# Altium PCB DWM1000_Basic_Board.PcbDoc
Units mil, origin at the board's own origin, x right, y up, seen from the top; angles counter-clockwise.
Board outline 1023.62 x 1023.62 mil, 2 copper layers (Top Layer, Bottom Layer); 20 components, 27 nets, 71 pads, 12 vias.
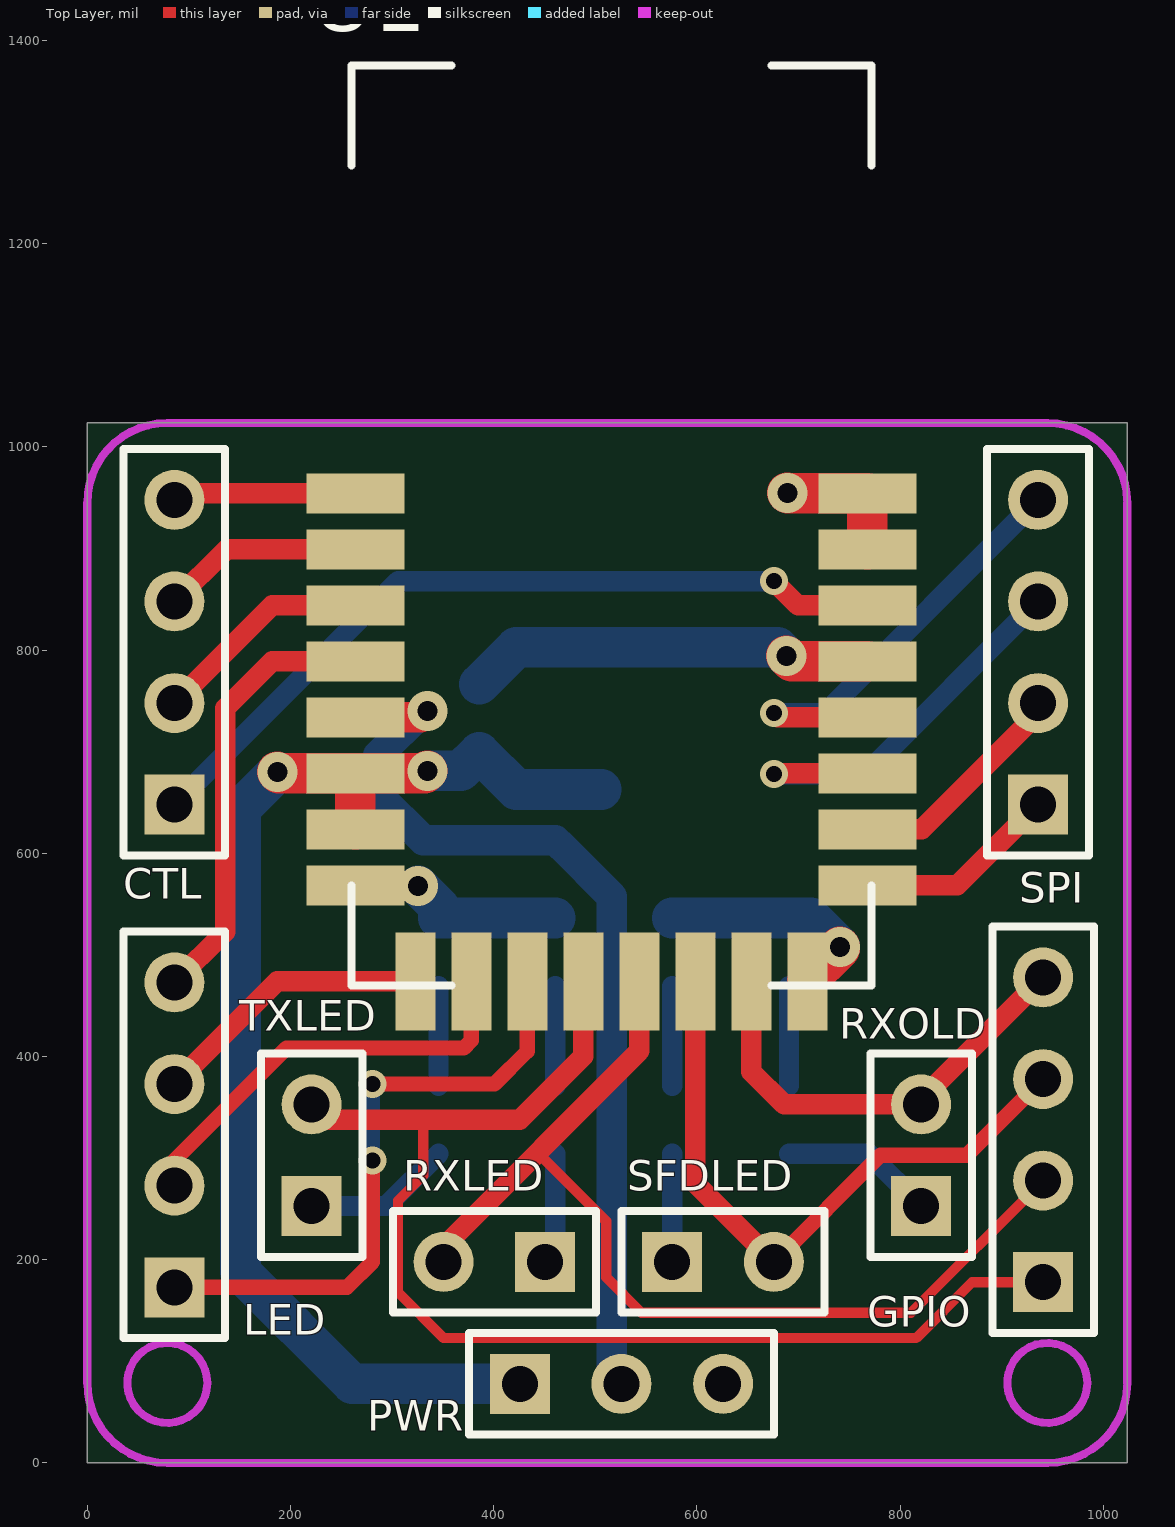
[diagram p0: Top Layer view]
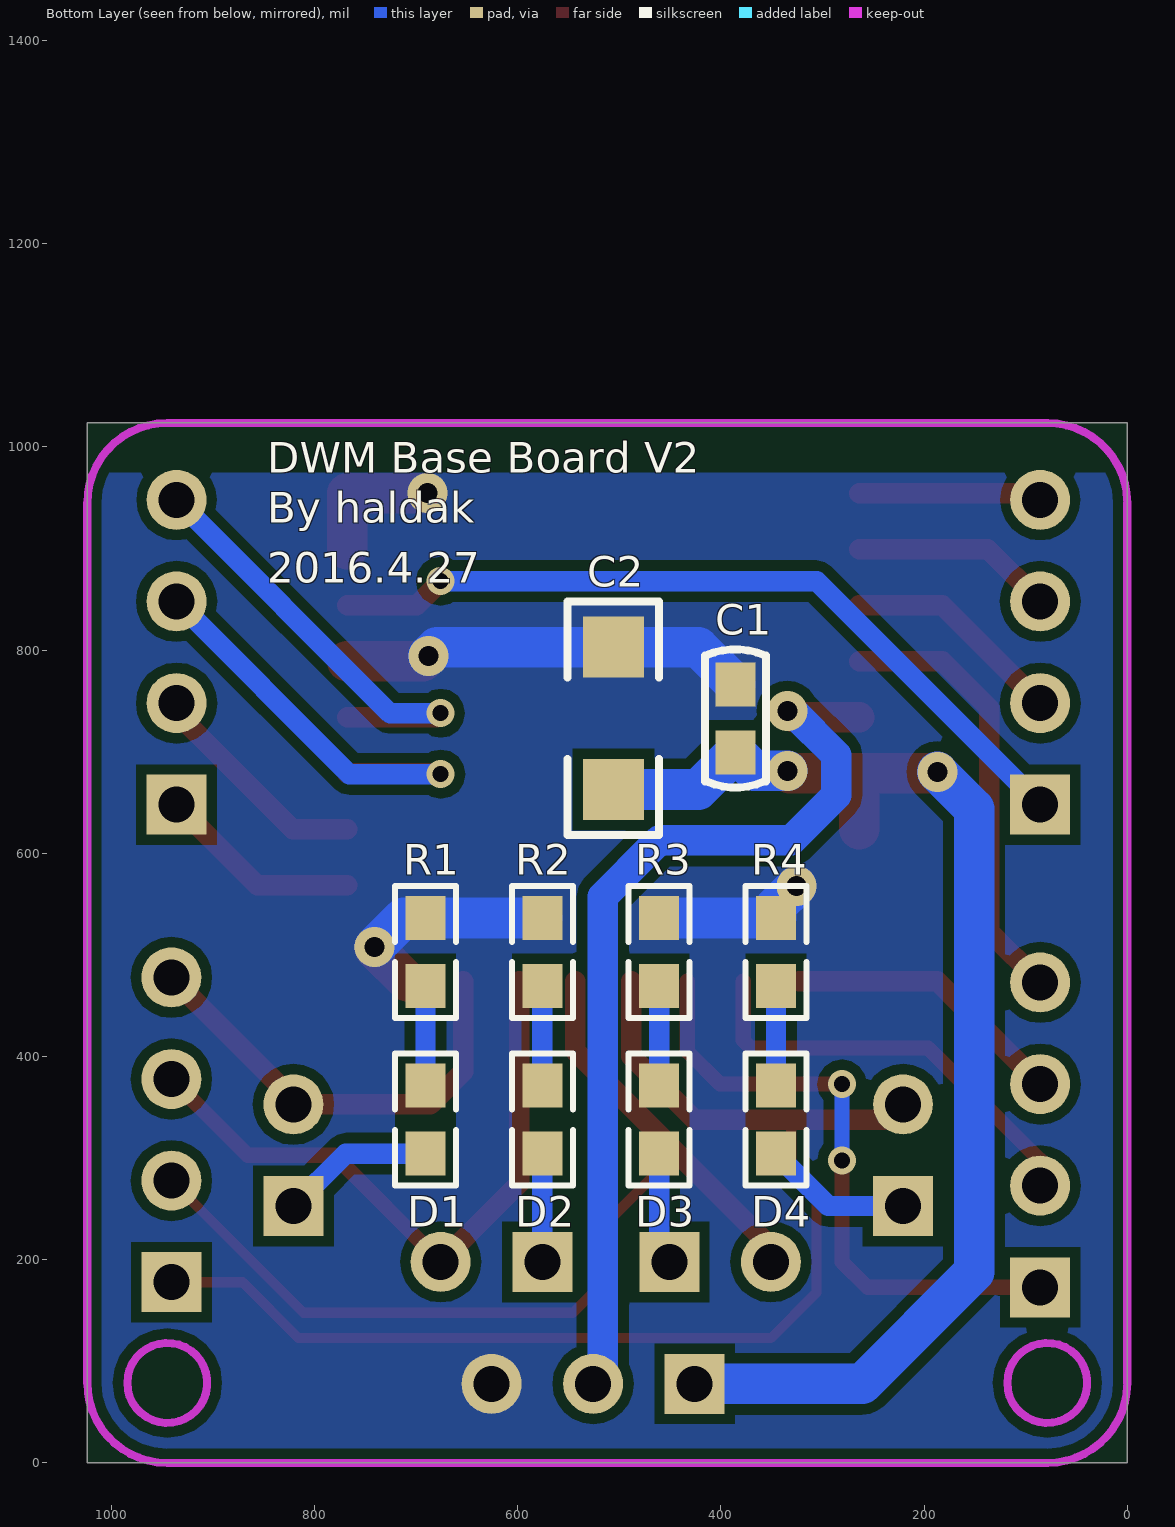
[diagram p1: Bottom Layer view, seen from below]
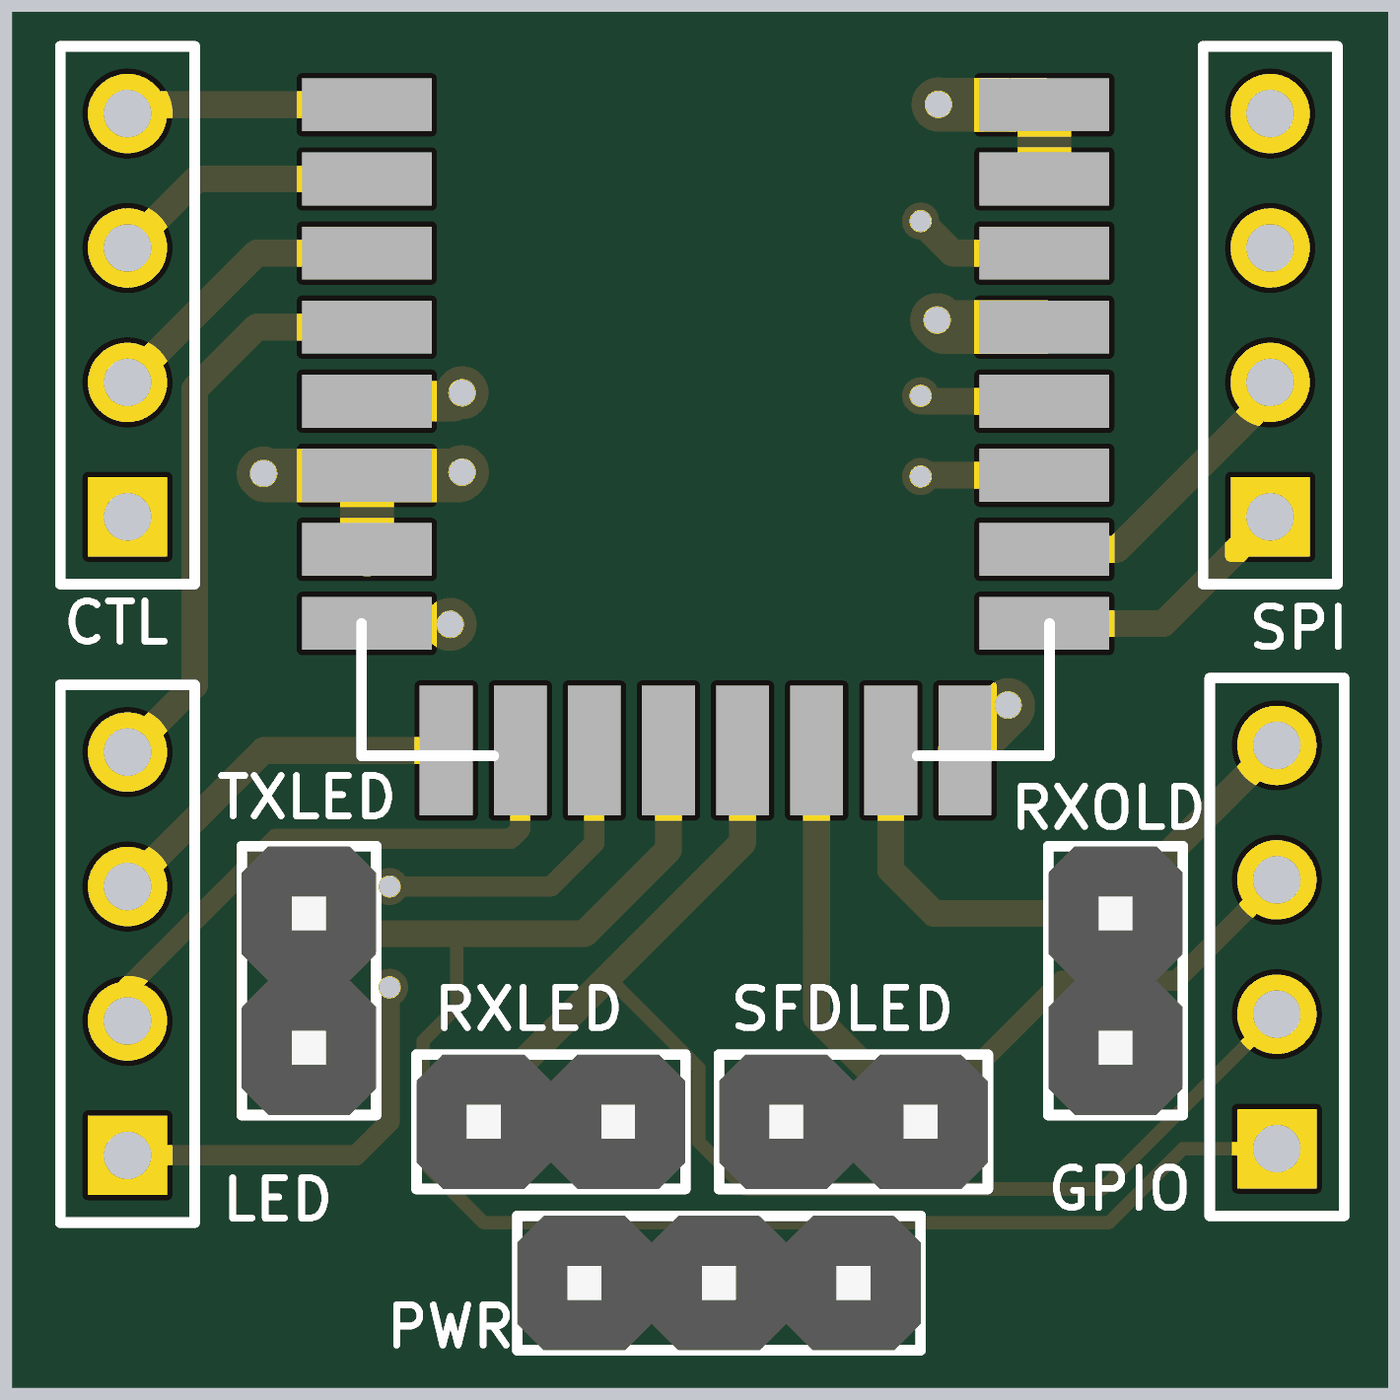
[diagram p2: 3D render of the assembled board from above, using the file's embedded part models]
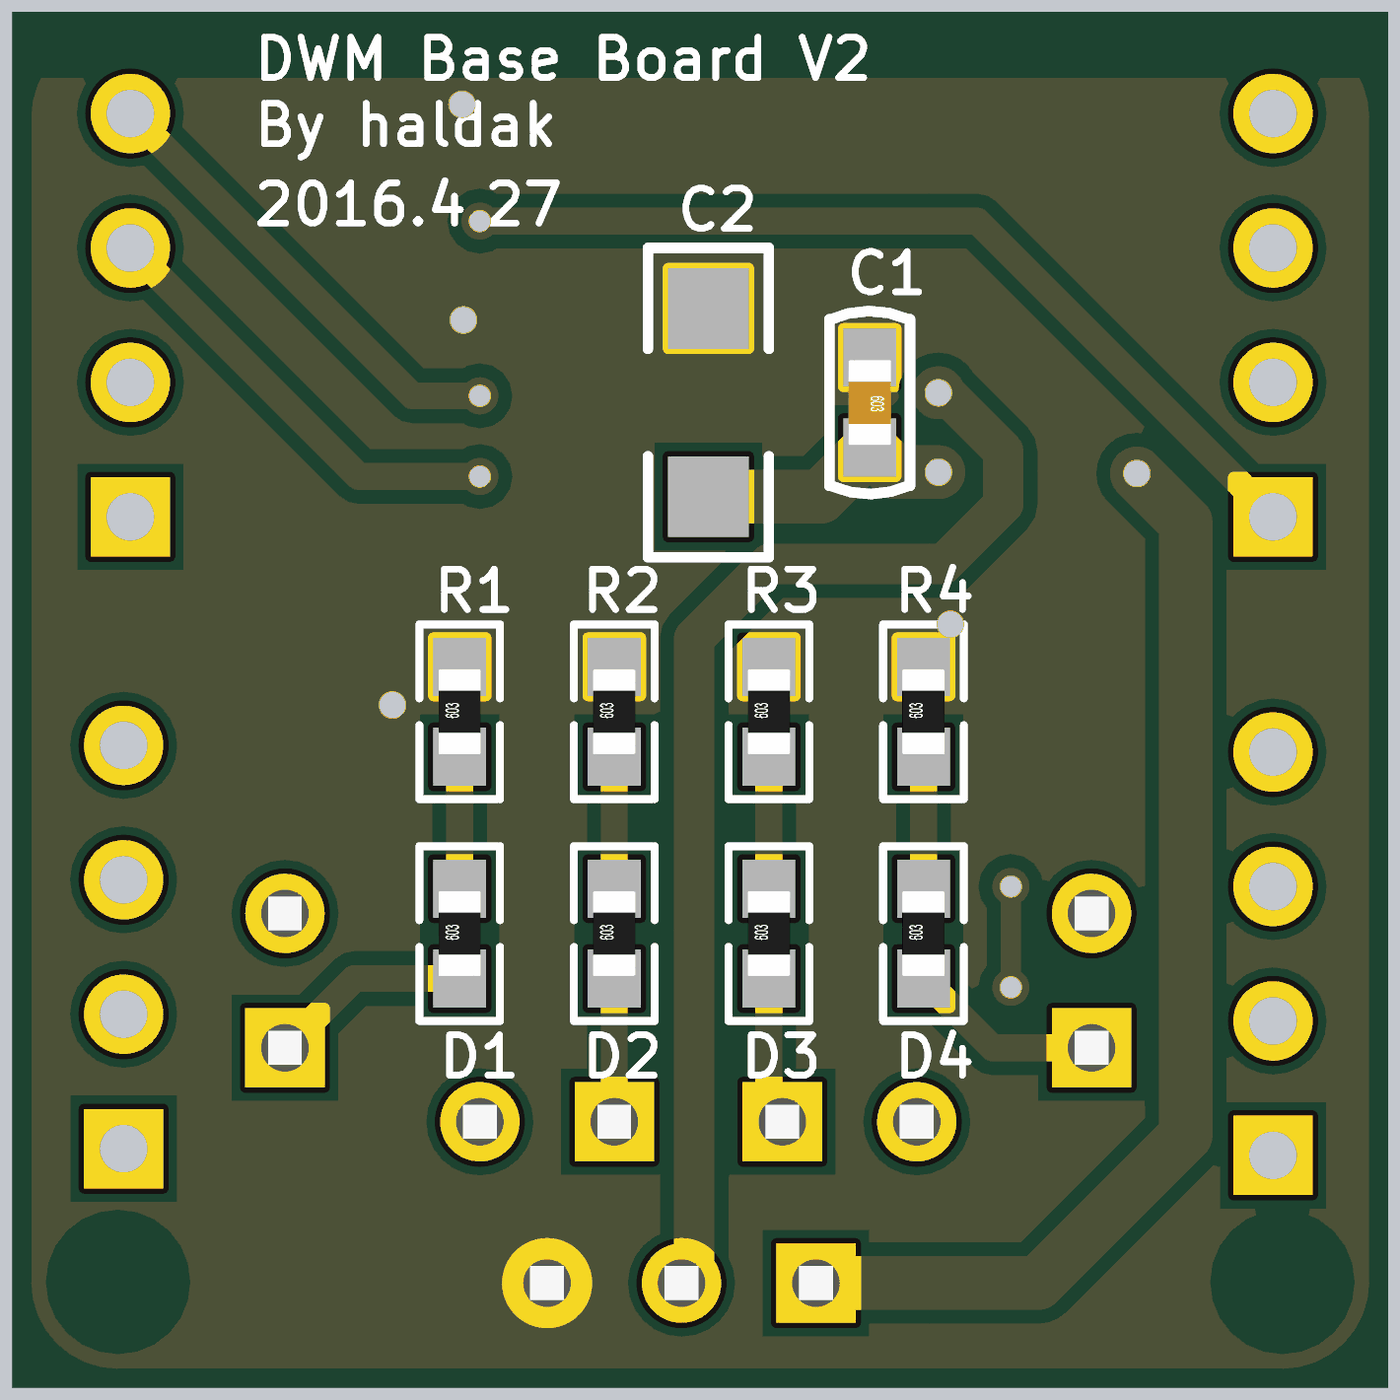
[diagram p3: 3D render of the assembled board from below, using the file's embedded part models]

## Layer stack, top to bottom
Top Solder: solder mask 0.4, Solder Resist, Dk 3.5
Top Layer: signal copper 1.4
Dielectric 1: dielectric 12.6, FR-4, Dk 4.8
Bottom Layer: signal copper 1.4
Bottom Solder: solder mask 0.4, Solder Resist, Dk 3.5

## Board outline
0,0 1023.62,0 1023.62,1023.62 0,1023.62

## Design rules (kind name [scope] priority, off if disabled: settings)
Clearance [All] p1: gap=10
PolygonConnect [All] p1: connectstyle=Direct reliefconductorwidth=10 reliefentries=4 polygonreliefangle="90 Angle" airgapwidth=10
RoutingVias [All] p1: holewidth=28 width=50 viastyle="Through Hole" minholewidth=28 minwidth=50 maxholewidth=28 maxwidth=50
SolderMaskExpansion [All] p1: expansion=4
Width [All] p1: maxlimit=50 minlimit=10 preferedwidth=10 minimp=50.000000 maximp=50.000000 favimp=50.000000
30 further rules are at their usual default settings.

## Components (designator, comment, footprint, x,y, rotation, side; value= is the part's Value field where it differs from the comment)
C1 "Cap-S" C-0603 385.75,732.88 r270 bottom
C2 "Cap-Pol" 1206 505.75,732.88 r90 bottom
CTL "Header 4" HDR4X1-2.54 85.75,647.88 r90 top
D1 "LED0" 0603-1 690.75,337.88 r90 bottom
D2 "LED0" 0603-1 575.75,337.88 r90 bottom
D3 "LED0" 0603-1 460.75,337.88 r90 bottom
D4 "LED0" 0603-1 345.75,337.88 r90 bottom
GPIO "Header 4" HDR4X1-2.54 940.75,177.88 r90 top
LED "Header 4" HDR4X1-2.54 85.75,172.88 r90 top
PWR "Header 3" HDR3X1-2.54 425.75,77.88 r0 top
R1 "Res1" 0603-1 690.75,502.88 r90 bottom
R2 "Res1" 0603-1 575.75,502.88 r90 bottom
R3 "Res1" 0603-1 460.75,502.88 r90 bottom
R4 "Res1" 0603-1 345.75,502.88 r90 bottom
RXLED "Header 2" HDR2X1-2.54 450.75,197.88 r180 top
RXOLD "Header 2" HDR2X1-2.54 820.75,252.88 r90 top (schematic designator RXOLED)
SFDLED "Header 2" HDR2X1-2.54 575.75,197.88 r0 top
SPI "Header 4" HDR4X1-2.54 935.75,647.88 r90 top
TXLED "Header 2" HDR2X1-2.54 220.75,252.88 r90 top
U1 "DWM1000" DWM1000 515.75,922.88 r0 top

## Footprints (in the part's own frame and the unit in brackets; to place one, negate y for a bottom-side part, rotate by r counter-clockwise, add the part's x,y. Pads: shape width x height; smd on the part's side, far side on the other; paste and mask are expansions set on the pad)
0603-1 [mm] "0603带丝印"
  rect 1.1x1 smd: 1(-0.85,0) 2(0.85,0)
  silkscreen extent -1.65,-0.76 1.65,0.76, body extent -0.8,-0.4 0.8,0.4, height 0.3
1206 [mil] "贴片元件"
  rect 60x60 smd: 1(-70,0) 2(70,0)
  silkscreen extent -115,-45 115,45, body extent -75,-35 75,35, height 39
C-0603 [mm] "贴片电容"
  rect 1.1x1 smd: 1(-0.85,0) 2(0.85,0)
  silkscreen extent -1.73,-0.76 1.73,0.76, body extent -0.8,-0.4 0.8,0.4, height 0.3
DWM1000 [mm] "Decawave Inc."
  rect 2.45x1 smd paste+0 mask+0.1: 1(-6.4,0.8) 2(-6.4,-0.6) 3(-6.4,-2) 4(-6.4,-3.4) 5(-6.4,-4.8) 6(-6.4,-6.2) 7(-6.4,-7.6) 8(-6.4,-9) 17(6.4,-9) 18(6.4,-7.6) 19(6.4,-6.2) 20(6.4,-4.8) 21(6.4,-3.4) 22(6.4,-2) 23(6.4,-0.6) 24(6.4,0.8)
  rect 1x2.45 smd paste+0 mask+0.1: 9(-4.9,-11.4) 10(-3.5,-11.4) 11(-2.1,-11.4) 12(-0.7,-11.4) 13(0.7,-11.4) 14(2.1,-11.4) 15(3.5,-11.4) 16(4.9,-11.4)
  silkscreen extent -6.5,-11.5 6.5,11.5
HDR2X1-2.54 [mm] "2.54单排针排座"
  rect 1.5x1.5 hole 0.9: 1(0,0)
  round 1.5 hole 0.9: 2(2.54,0)
  silkscreen extent -1.27,-1.27 3.81,1.27, body extent -1.27,-1.27 3.81,1.27, height 8.54
HDR3X1-2.54 [mm] "2.54单排针排座"
  rect 1.5x1.5 hole 0.9: 1(0,0)
  round 1.5 hole 0.9: 2(2.54,0) 3(5.08,0)
  silkscreen extent -1.27,-1.27 6.35,1.27, body extent -1.27,-1.27 6.35,1.27, height 8.54
HDR4X1-2.54 [mm] "2.54单排针排座"
  rect 1.5x1.5 hole 0.9: 1(0,0)
  round 1.5 hole 0.9: 2(2.54,0) 3(5.08,0) 4(7.62,0)
  silkscreen extent -1.27,-1.27 8.89,1.27

## Part data
C1: "贴片瓷片电容"
C2: "贴片电解电容"
CTL GPIO LED PWR RXLED RXOLD SFDLED SPI TXLED: "接插件"
D1 D2 D3 D4: "发光二极管"
R1 R2 R3 R4: "贴片电阻"

## Via types
v1: diameter 39.37, hole 19.68, Top Layer to Bottom Layer, tented both sides, 7 vias
v2: diameter 27.56, hole 15.75, Top Layer to Bottom Layer, tented both sides, 5 vias

## Nets (pads, with @x,y where several pads share a name; then routed paths per layer and width w, separated by ;. In a path a pad name is that pad's centre, name@x,y a point inside that pad or via, vN(x,y) a via of type N, cw(c..) or ccw(c..) an arc to the next point about the centre after c; other vN are vias at no path point)
CLK: SPI.4 U1.20 | length 440.6
  Top Layer w20: v2(675.75,737.88) 679.73,733.9 U1.20
  Bottom Layer w20: v2(675.75,737.88) 725.75,737.88 SPI.4
CSN: SPI.1 U1.17 | length 200.9
  Top Layer w20: U1.17 856.42,568.55 SPI.1
EXTON: CTL.4 U1.1 | length 171.5
  Top Layer w20: CTL.4@92.25,954.37 U1.1
GND: C1.1 C2.2 PWR.3 R1.2 R2.2 R3.2 R4.2 U1.8 U1.16 U1.21 U1.23 U1.24 | length 915.6
  Top Layer w40: v1(687.99,794.29) 693.27,789.02 U1.21 ; v1(688.98,954.72) 689.33,954.37 U1.24 U1.23 ; U1.16 740.75,506.14 v1(740.75,507.88)
  Bottom Layer w40: v1(325.75,567.88) 345.75,547.88 R4.2 R3.2 ; C1.1 422.29,802.88 C2.2 679.41,802.88 v1(687.99,794.29) ; R2.2 R1.2 712.28,536.34 v1(740.75,507.88)
GPIO4: LED.1 U1.11 | length 614.9
  Top Layer w15: LED.1 255.75,172.88 280.75,197.88 v2(280.75,297.88) ; v2(280.75,372.88) 400.75,372.88 433.07,405.2 U1.11
  Bottom Layer w15: v2(280.75,297.88) v2(280.75,372.88)
GPIO5: LED.2 U1.10 | length 424.4
  Top Layer w15: LED.2 85.75,297.88 196.2,408.33 370.61,408.33 377.95,415.67 U1.10
GPIO6: LED.3 U1.9 | length 279
  Top Layer w20: LED.3 186.93,474.06 U1.9
GPIO7: LED.4 U1.4 | length 437.9
  Top Layer w20: LED.4 135.75,522.88 135.75,742.88 181.89,789.02 U1.4
IRQ: CTL.1 U1.22 | length 782.9
  Top Layer w20: v2(675.75,867.88) 699.49,844.14 U1.22
  Bottom Layer w20: CTL.1 305.75,867.88 v2(675.75,867.88)
MISO: SPI.3 U1.19 | length 422.8
  Top Layer w20: v2(675.75,677.88) 676.66,678.78 U1.19
  Bottom Layer w20: v2(675.75,677.88) 765.75,677.88 SPI.3
MOSI: SPI.2 U1.18 | length 225.3
  Top Layer w20: U1.18 821.54,623.66 935.75,737.88 SPI.2
NetD1_1: D1.1 RXOLD.1 | length 151.3
  Bottom Layer w20: D1.1 769.21,304.41 RXOLD.1
NetD1_2: D1.2 R1.1 | length 98.1
  Bottom Layer w20: D1.2 R1.1
NetD2_1: D2.1 SFDLED.1 | length 106.5
  Bottom Layer w20: SFDLED.1 D2.1
NetD2_2: D2.2 R2.1 | length 98.1
  Bottom Layer w20: D2.2 R2.1
NetD3_1: D3.1 RXLED.1 | length 110.7
  Bottom Layer w20: RXLED.1 460.75,207.88 D3.1
NetD3_2: D3.2 R3.1 | length 98.1
  Bottom Layer w20: D3.2 R3.1
NetD4_1: D4.1 TXLED.1 | length 146.3
  Bottom Layer w20: TXLED.1 294.21,252.88 D4.1
NetD4_2: D4.2 R4.1 | length 98.1
  Bottom Layer w20: D4.2 R4.1
RSTN: CTL.2 U1.3 | length 217.9
  Top Layer w20: CTL.2 182.01,844.14 U1.3
RXLED: GPIO.2 RXLED.2 U1.13 | length 994.3
  Top Layer w10: 450.75,297.88 510.75,237.88 510.75,182.61 545.48,147.88 810.75,147.88 GPIO.2
  Top Layer w20: RXLED.2 350.75,212.88 543.31,405.44 U1.13
RXOKLED: GPIO.4 RXOLD.2 U1.15 | length 444.2
  Top Layer w20: U1.15 653.55,385.08 685.75,352.88 RXOLD.2 820.75,357.88 GPIO.4
SFDLED: GPIO.3 SFDLED.2 U1.14 | length 647.8
  Top Layer w15: SFDLED.2 780.75,302.88 865.75,302.88 GPIO.3
  Top Layer w20: U1.14 598.43,275.2 SFDLED.2
TXLED: GPIO.1 TXLED.2 U1.12 | length 1230
  Top Layer w10: 330.75,337.88 330.75,283.05 305.75,258.05 305.75,167.88 350.75,122.88 815.75,122.88 870.75,177.88 GPIO.1
  Top Layer w20: TXLED.2 235.75,337.88 330.75,337.88 425.75,337.88 488.19,400.32 U1.12
VCC_3V3: C1.2 C2.1 PWR.1 U1.6 U1.7 | length 1225.9
  Top Layer w40: v1(187.01,680.12) 188.34,678.78 U1.6 ; U1.7 U1.6 ; v1(334.65,681.1) 332.32,678.78 U1.6
  Bottom Layer w40: v1(187.01,680.12) 150.75,643.86 150.75,187.88 260.75,77.88 PWR.1 ; v1(334.65,681.1) 367.44,681.1 C1.2 422.29,662.88 C2.1
VDDAON: PWR.2 U1.5 | length 933.7
  Top Layer w30: U1.5 328.39,733.9 v1(334.65,740.16)
  Bottom Layer w30: v1(334.65,740.16) 330.06,740.16 286.42,696.51 286.42,657.29 330.83,612.88 460.4,612.88 465.39,607.88 465.91,607.88 516.38,557.4 516.38,87.24 PWR.2
WKP: CTL.3 U1.2 | length 199.3
  Top Layer w20: CTL.3 137.13,899.25 U1.2

## Polygon pours and split planes (outlines as drawn)
GND on Bottom Layer "Top Layer-No Net" (solid, remove dead copper, pour order 20): 1023.62,974.41 0,974.41 0,0 1023.62,0

## Keep-outs
Keep-Out Layer:
  circle w7.87: c78.74,78.74 r39.37
  circle w7.87: c944.88,78.74 r39.37
  lines w7.87: 0,78.74 ccw(c78.74,78.74) 78.74,0 ; 0,944.88 cw(c78.74,944.88) 78.74,1023.62 ; 944.88,0 ccw(c944.88,78.74) 1023.62,78.74 ; 944.88,1023.62 cw(c944.88,944.88) 1023.62,944.88
  lines w8: 0,78.74 0,944.88 ; 78.74,0 944.88,0 ; 78.74,1023.62 944.88,1023.62 ; 1023.62,78.74 1023.62,944.88

## Silkscreen, mask and mechanical layers (free items; w line width, h text height)
Bottom Overlay:
  text "DWM Base Board V2" at 846.46,974.41 h30
  text "By haldak" at 846.46,925.2 h30
  text "2016.4.27" at 846.46,866.14 h30